# Altium PCB DDAQ.PcbDoc (part 2 of 2)
Units mil, origin at the board's own origin, x right, y up, seen from the top; angles counter-clockwise.
Board outline 3460 x 3375 mil, 2 copper layers (Top Layer, Bottom Layer); 150 components, 168 nets, 579 pads, 171 vias.
Unrouted connection lines stored in the file: 4.
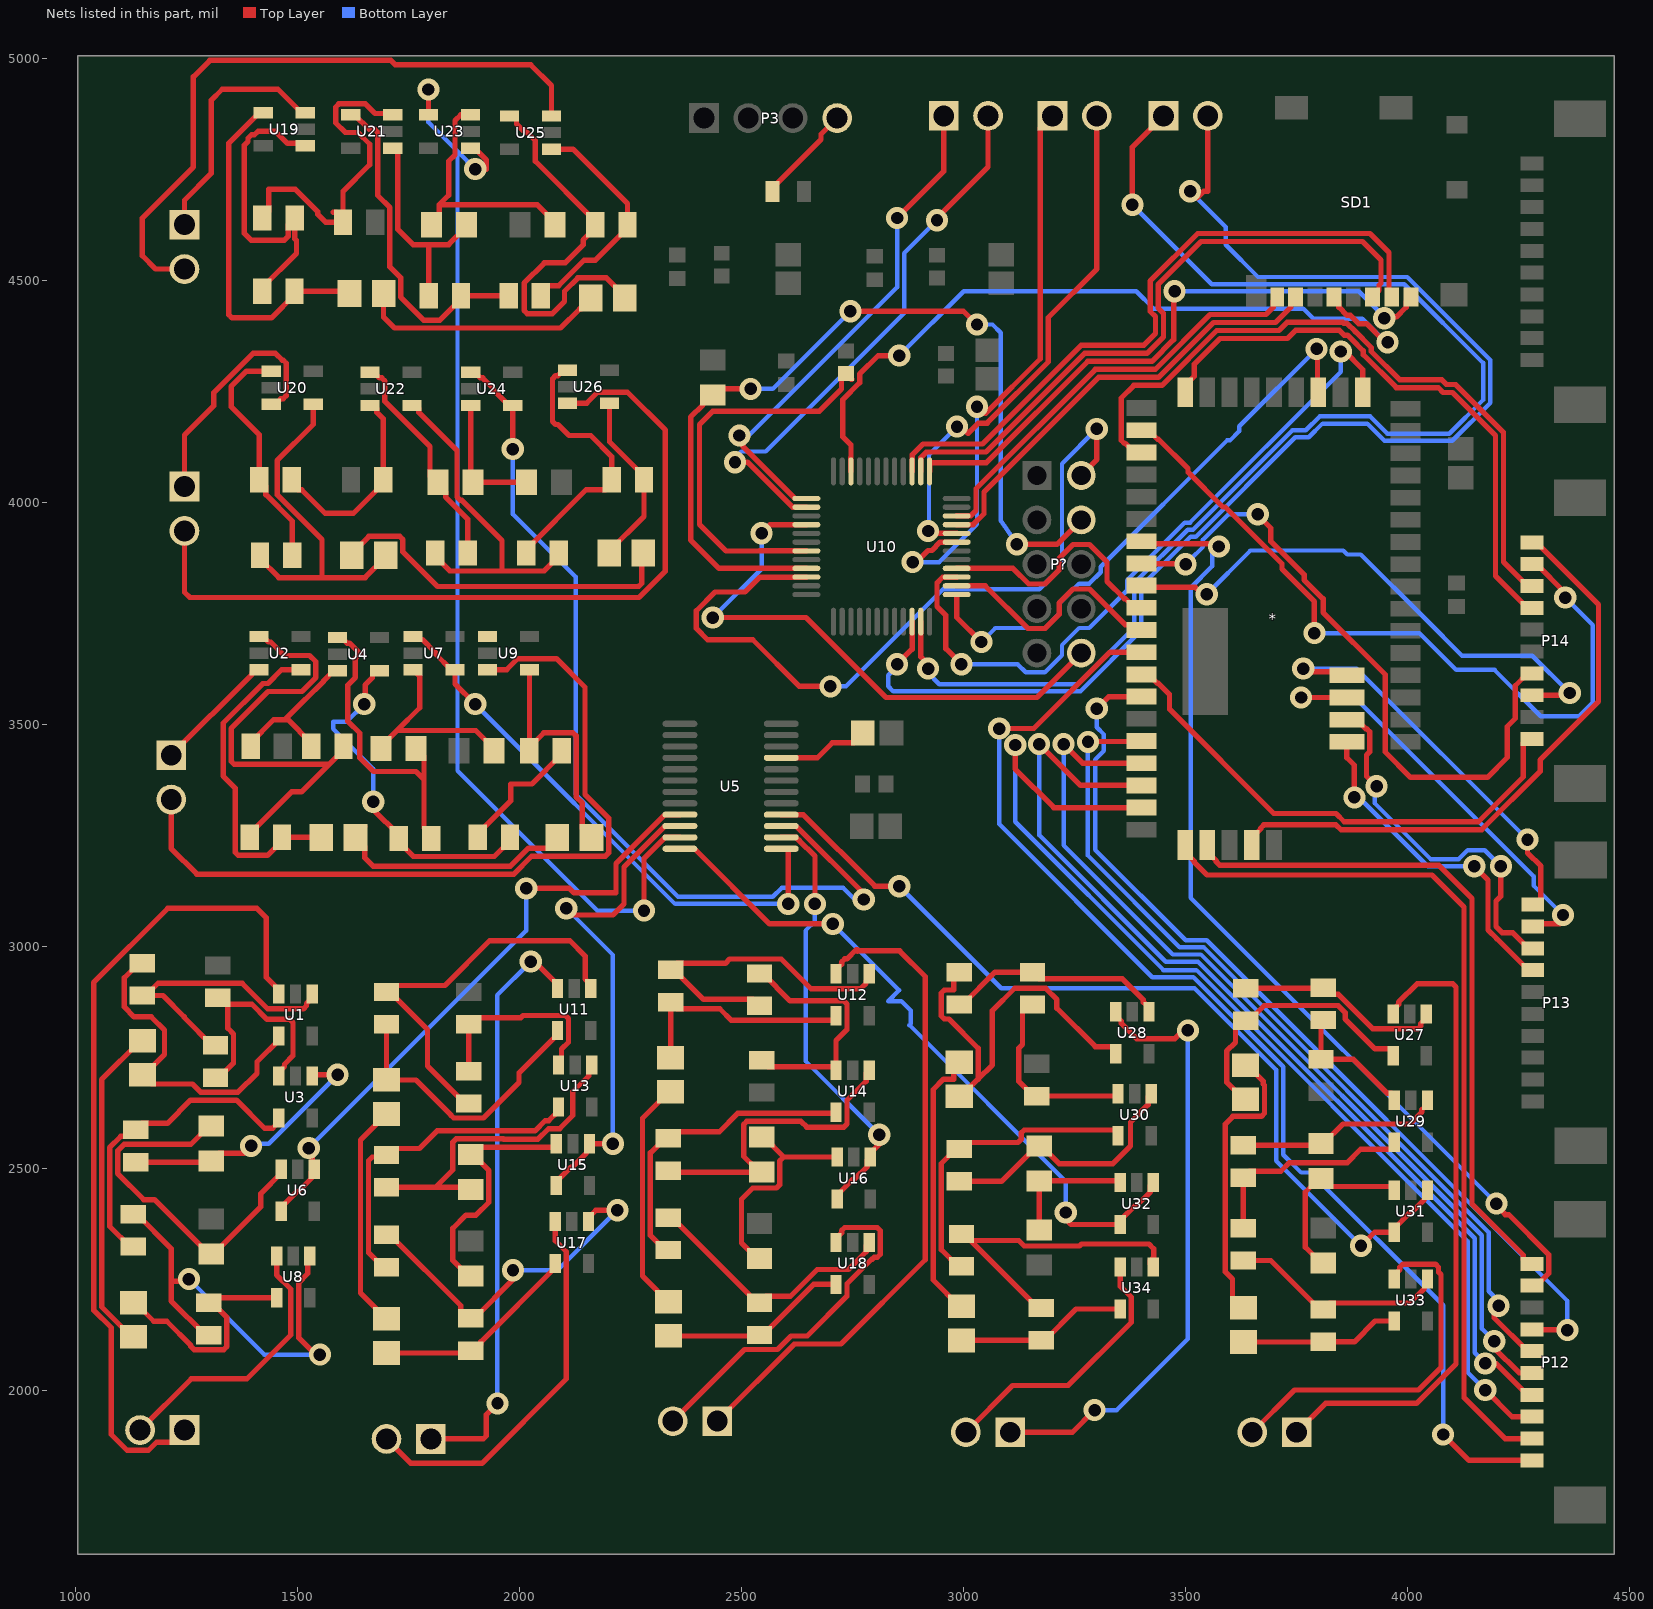
[diagram p2: the nets of this part, all layers, seen from the top]

## Via types
v1: diameter 50, hole 28, Top Layer to Bottom Layer, 171 vias

## Nets (pads, with @x,y where several pads share a name; then routed paths per layer and width w, separated by ;. In a path a pad name is that pad's centre, name@x,y a point inside that pad or via, vN(x,y) a via of type N, cw(c..) or ccw(c..) an arc to the next point about the centre after c; other vN are vias at no path point) (continued)
Net*_32: *.32 P12.9 | length 2212
  Top Layer w12: *.32@3400.51,3911.97 3406.5,3905.98 3569.02,3905.98 v1(3575,3900) ; v1@4205,2410 4220,2395 4227.8,2395 4317.59,2305.21 4317.59,2263.02 4289.84,2235.27 P12.9@4280,2235.27
  Bottom Layer w10: v1@3560,3900 3560,3855.91 3511.5,3807.41 3511.5,3108.5 v1(4200,2420)
Net*_33: *.33 P14.4 | length 1504.2
  Top Layer w12: *.33@3400.51,3861.97 3401.5,3860.98 3499.02,3860.98 v1(3500,3860) ; v1(3662.5,3972.5) 3662.5,3970.69 3692,3941.19 3692,3911.69 3767,3836.69 3767,3824.76 3809.65,3782.11 3809.65,3751.74 3949.54,3611.86 3949.54,3437.31 4006.85,3380 4179.54,3380 4224.41,3424.87 4224.41,3494.75 4242.41,3512.75 4242.41,3586.47 4270.16,3614.21 P14.4@4280,3614.21
  Bottom Layer w10: v1@3500,3870 3510,3870 3539,3899 3539,3915.21 3596.29,3972.5 v1(3662.5,3972.5)
Net*_34: *.34 P14.3 | length 1233.4
  Top Layer w12: *.34@3400.51,3811.97 3404.48,3808 3521.72,3808 3537.22,3792.5 v1(3547.5,3792.5) ; P14.3@4280,3565 4360,3565 v1(4365,3570)
  Bottom Layer w10: v1(3547.5,3792.5) 3646,3891 3854.91,3891 3863.91,3882 3894.46,3882 4039.46,3737 4122.46,3654 4281,3654 v1(4365,3570)
Net*_37: *.37 P12.1 | length 2686.7
  Top Layer w12: v1(3080,3490) 3157.9,3490 3329.87,3661.97 *.37@3400.51,3661.97 ; v1(4080,1900) 4138.43,1841.57 P12.1@4280,1841.57
  Bottom Layer w10: v1(3080,3490) 3080,3275 3425,2930 3517.63,2930 3719.67,2727.95 3719.67,2530.33 3760,2490 3780.91,2490 4080,2190.91 v1(4080,1900)
Net*_38: *.38 P14.1 | length 1158.3
  Top Layer w12: *.38@3400.51,3611.97 3416.26,3611.97 3436.54,3591.69 3438.95,3591.69 3463.5,3567.13 3463.5,3533.58 3698.45,3298.64 3838.58,3298.64 3857.22,3280 4159.27,3280 4260.41,3381.14 4260.41,3456.83 4270.16,3466.58 P14.1@4280,3466.58
Net*_39: *.39 P12.7 | length 2076.1
  Top Layer w12: v1(3300,3535) 3326.97,3561.97 *.39@3400.51,3561.97 ; P12.7@4280,2136.85 4280.93,2135.93 4359.07,2135.93 v1(4360,2135)
  Bottom Layer w10: v1(3300,3535) 3300,3492.63 3316,3476.63 3316,3440 3296,3420 3296,3217 3500,3013 3547.76,3013 4360,2200.76 v1(4360,2135)
Net*_41: *.41 P12.6 | length 1953.7
  Top Layer w12: v1(3280,3460) 3280.98,3460.98 3399.53,3460.98 *.41@3400.51,3461.97 ; v1(4205,2190) 4195,2180 4195,2162.8 4270.16,2087.64 P12.6@4280,2087.64
  Bottom Layer w10: v1(3280,3460) 3280,3204 3487,2997 3541.14,2997 4183,2355.14 4183,2222.82 4205,2200.82 v1(4205,2190)
Net*_42: *.42 P12.5 | length 2100.8
  Top Layer w12: v1(3225,3455) 3268.03,3411.97 *.42@3400.51,3411.97 ; v1(4195,2110) 4195,2095 4251.58,2038.42 P12.5@4280,2038.42
  Bottom Layer w10: v1(3225,3455) 3225,3227 3471,2981 3534.51,2981 4167,2348.51 4167,2138.57 4195,2110.57 v1(4195,2110)
Net*_43: *.43 P12.4 | length 2257.3
  Top Layer w12: v1(3170,3455) 3263.03,3361.97 *.43@3400.51,3361.97 ; v1(4175,2060) 4199.37,2060 4270.16,1989.21 P12.4@4280,1989.21
  Bottom Layer w10: v1(3170,3455) 3170,3250 3455,2965 3527.88,2965 4151,2341.88 4151,2084 v1(4175,2060)
Net*_44: *.44 P12.3 | length 2439.6
  Top Layer w12: v1(3116,3453) 3116,3399 3203.03,3311.97 *.44@3400.51,3311.97 ; v1(4175,2000) 4235,1940 P12.3@4280,1940
  Bottom Layer w10: v1(3116,3453) 3116,3280 3450,2946 3524.25,2946 4135,2335.25 4135,2040 v1(4175,2000)
Net*_46: *.46 P12.2 | length 1993.4
  Top Layer w12: *.46@3498.94,3227.72 3498.94,3211.97 3519.22,3191.69 3519.22,3189.28 3548.5,3160 4055,3160 4127,3088 4127,1983 4220,1890 4279.21,1890 P12.2@4280,1890.79
Net*_47: *.47 P12.10 | length 1541
  Top Layer w12: *.47@3548.94,3227.72 3548.94,3211.97 3569.14,3191.77 3569.14,3189.36 3576.25,3182.25 4069.97,3182.25 4145,3107.22 4145,2419.49 4260.41,2304.08 4260.41,2294.24 4270.16,2284.49 P12.10@4280,2284.49
Net*_52: *.52 P13.7 | length 760.9
  Top Layer w12: *.52@3863.11,3460 3863.11,3424.28 3880,3407.39 v1(3880,3335) ; v1(4150,3180) 4181,3149 4181,3036.56 4201.07,3016.49 4271.89,2945.67 P13.7@4281.73,2945.67
  Bottom Layer w10: v1(3880,3335) 3890,3335 4045,3180 v1(4150,3180)
Net*_53: *.53 P13.8 | length 840.2
  Top Layer w12: *.53@3863.11,3510 3884.76,3510 3905.05,3489.72 3907.45,3489.72 3914.48,3482.69 3914.48,3437.31 3907.45,3430.28 3907.45,3382.55 v1(3930,3360) ; v1(4210,3180) 4210,3112.37 4199,3101.37 4199,3044.02 4212.69,3030.32 4236.45,3030.32 4271.89,2994.88 P13.8@4281.73,2994.88
  Bottom Layer w10: v1(3930,3360) 3926.31,3356.31 3926.31,3321.31 4051.63,3196 4115,3196 4135,3216 4174,3216 v1(4210,3180)
Net*_54: *.54 P13.9 | length 1004.8
  Top Layer w12: v1(3760,3560) *.54@3863.11,3560 ; P13.9@4271.89,3044.09 P13.9@4281.73,3044.09 4287.64,3050 4342.97,3050 4350,3057.03 v1(4350,3070)
  Bottom Layer w10: v1(3760,3560) 3880.91,3560 4283.63,3157.28 4283.63,3136.37 v1(4350,3070)
Net*_55: *.55 P13.10 | length 940.5
  Top Layer w12: v1(3765,3625) 3772.27,3617.73 3855.38,3617.73 *.55@3863.11,3610 ; v1(4270,3240) 4270,3210 4300,3180 4300,3103.06 4290.25,3093.31 P13.10@4281.73,3093.31
  Bottom Layer w10: v1(3765,3625) 3885,3625 v1(4270,3240)
NetC12_2: C12.2 U5.21 | length 207.7
  Top Layer w12: U5.21@2589.17,3423.98 2670.3,3423.98 2704.32,3458 2752.49,3458 2772.52,3478.03 C12.2@2772.52,3480
NetC13_1: C13.1 U10.43 | length 883.4
  Top Layer w12: U10.43@2645.71,3890.16 2540.87,3890.16 2540.71,3890 2465,3890 2405,3950 2405,4175 2435,4205 2675.2,4205 2724.87,4254.68 2724.87,4279.28 C13.1@2735,4289.41 ; C13.1@2746.81,4276.61 C13.1@2747.8,4276.61
NetFB1_2: FB1.2 P3.4 | length 225.2
  Top Layer w12: FB1.2@2569.57,4700 2569.57,4707.87 2678.61,4816.92 2678.61,4828.61 P3.4@2715,4865
NetP1_1: P1.1 U1.3 | length 1891.8
  Top Layer w12: P1.1@1245,1910 1217.54,1882.54 1181.83,1882.54 1163.83,1864.54 1115.46,1864.54 1080,1900 1080,2140.61 1040.46,2180.15 1040.46,2918.06 1207.4,3085 1407.97,3085 1429.39,3063.58 1429.39,2929.31 1457.6,2901.1 U1.3@1457.6,2892.24 U1.3@1457.6,2883.39
NetP1_2: P1.2 U8.3 | length 619.4
  Top Layer w12: P1.2@1145,1910 1260.25,2025.26 1385.26,2025.26 1484.61,2124.61 1484.61,2227.17 1452.6,2259.18 U8.3@1452.6,2302.24
NetP2_1: P2.1 U2.3 | length 279.7
  Top Layer w12: P2.1@1215,3430 1397.1,3612.1 1397.1,3615.8 1403.9,3622.6 U2.3@1412.76,3622.6
NetP2_2: P2.2 U9.3 | length 1790.8
  Top Layer w12: P2.2@1215,3330 1215,3220 1273,3162 1986.79,3162 2027.28,3202.49 2193.32,3202.49 2200.35,3209.52 2200.35,3288.33 2147,3341.67 2147,3583 2082.61,3647.39 1995.62,3647.39 1970.82,3622.6 U9.3@1927.76,3622.6
NetP4_1: P4.1 U10.11 | length 2989.1
  Top Layer w12: U10.11@2903.58,3730.71 2903.58,3651.7 2920,3635.28 v1(2920,3625) ; v1(3380,4670) 3380,4800 P4.1@3450,4870
  Bottom Layer w10: v1(2920,3625) 2920,3615 2945,3590 3256.49,3590 3384.28,3717.79 3384.28,3817.82 3504.46,3938 3516.54,3938 3740.54,4162 3770.83,4162 3801.83,4193 3915.54,4193 3954.54,4154 4094,4154 4170,4230 4170,4313.54 3992.54,4491 3559,4491 v1(3380,4670)
NetP4_2: P4.2 U10.10 | length 3064.5
  Top Layer w12: v1(2850,3635) 2883.9,3668.9 U10.10@2883.9,3730.71 ; v1(3510,4700) 3510.22,4700 3525.25,4684.97 3540.28,4700 3550,4700 P4.2@3550,4870
  Bottom Layer w10: v1(2850,3635) 2850,3630 2830,3610 2830,3585 2841,3574 3263.12,3574 3400.28,3711.16 3400.28,3811.19 3511.09,3922 3523.17,3922 3747.17,4146 3777.46,4146 3808.46,4177 3908.91,4177 3947.91,4138 4100.63,4138 4186,4223.37 4186,4320.17 3999.17,4507 3663,4507 3590.33,4579.67 3590.33,4619.67 v1(3510,4700)
NetP5_1: P5.1 U10.19 | length 1321.2
  Top Layer w12: v1(2885,3865) 2893.79,3865 2919.8,3891.01 2928.34,3891.01 2947.07,3909.75 2984.2,3909.75 U10.19@2984.29,3909.84 ; v1(3030,4215) 3045,4200 3049.57,4200 3172.54,4322.97 3172.54,4842.54 P5.1@3200,4870
  Bottom Layer w10: v1(2885,3865) 2945,3865 3030,3950 v1(3030,4215)
NetP5_2: P5.2 U10.20 | length 1206.5
  Top Layer w12: v1(2920,3935) 2925.38,3929.62 2984.2,3929.62 U10.20@2984.29,3929.53 ; v1(2985,4170) 2995,4170 3010,4155 3033,4178 3053.02,4178 3190.54,4315.51 3190.54,4415.54 3300,4525 P5.2@3300,4870
  Bottom Layer w10: v1(2920,3935) 2920,3945 2922,3947 2922,4107 v1(2985,4170)
NetP6_1: P6.1 U10.37 | length 1141.8
  Top Layer w12: v1(2495,4150) 2502.27,4142.73 2502.27,4126.3 2620.31,4008.27 U10.37@2645.71,4008.27 ; v1(2850,4640) 2955,4745 P6.1@2955,4870
  Bottom Layer w10: v1(2495,4150) 2515.91,4150 2850,4484.09 v1(2850,4640)
NetP6_2: P6.2 U10.38 | length 1260.2
  Top Layer w12: v1(2485,4090) 2513.06,4090 2614.48,3988.58 U10.38@2645.71,3988.58 ; v1@2940,4640 3055,4755 P6.2@3055,4870
  Bottom Layer w10: v1(2485,4090) 2475,4090 2499,4114 2554,4114 2866,4426 2866,4561 v1(2940,4635)
NetP7_1: P7.1 U11.3 | length 1328.6
  Top Layer w12: P7.1@1800,1890 1917.97,1890 1925,1897.03 1925,1945 v1(1950,1970) ; v1(2025,2965) 2033.54,2965 2085.2,2913.35 U11.3@2085.2,2904.49
  Bottom Layer w10: v1(1950,1970) 1949,1971 1949,2889 v1(2025,2965)
NetP7_2: P7.2 U17.3 | length 871.2
  Top Layer w12: P7.2@1700,1890 1755,1835 1915,1835 2104.99,2024.99 2104.99,2311.62 2080.2,2336.42 U17.3@2080.2,2379.49
NetP8_1: P8.1 U12.3 | length 1517.1
  Top Layer w12: P8.1@2445,1930 2618.73,2103.73 2723.73,2103.73 2913.46,2293.46 2913.46,2931.54 2855.79,2989.21 2762.18,2989.21 2760.97,2988 2760.97,2992 2758.18,2992 2737.39,2971.21 2732.23,2971.21 2725.2,2964.18 2725.2,2959.02 2712.6,2946.42 U12.3@2712.6,2937.56
NetP8_2: P8.2 U18.3 | length 817.2
  Top Layer w12: P8.2@2345,1930 2506.23,2091.23 2580.77,2091.23 2611.28,2121.73 2647.68,2121.73 2737.39,2211.45 2737.39,2239.48 2792.91,2295 2794.2,2295 2798.1,2298.91 2805.17,2298.91 2812.2,2305.93 2812.2,2359.18 2805.17,2366.21 2732.23,2366.21 2725.2,2359.18 2725.2,2354.02 2712.6,2341.42 U18.3@2712.6,2332.56
NetP10_1: P10.1 U19.3 | length 559.8
  Top Layer w12: P10.1@1245,4625 1245,4680 1305,4740 1305,4905 1330,4930 1455.47,4930 1508.07,4877.4 U19.3@1516.93,4877.4 1518.2,4877.4 U19.3@1525,4884.2
NetP10_2: P10.2 U25.3 | length 1472
  Top Layer w12: P10.2@1245,4525 1180,4525 1150,4555 1150,4640 1265,4755 1265,4957.97 1302.03,4995 1710,4995 1720,4985 2025,4985 2071.69,4938.31 U25.3@2071.69,4869.8
NetP11_1: P11.1 U20.3 | length 562.6
  Top Layer w12: P11.1@1245,4035 1245,4150.91 1311.27,4217.18 1311.27,4246.73 1399.57,4335.03 1449.97,4335.03 1465.2,4319.8 1467.14,4319.8 1474.17,4312.77 1474.17,4239.83 1467.14,4232.8 1461.98,4232.8 1449.37,4220.2 U20.3@1440.51,4220.2
NetP11_2: P11.2 U26.3 | length 1834
  Top Layer w12: P11.2@1245,3935 1245,3797.03 1257.03,3785 2268.43,3785 2328.03,3844.6 2328.03,4161.97 2242.61,4247.39 2175.62,4247.39 2150.82,4222.6 U26.3@2107.76,4222.6
NetP16_1: P16.1 U27.3 | length 1452.7
  Top Layer w12: P16.1@3750,1905 3815,1970 4020,1970 4109,2059 4109,2907.97 4101.97,2915 4021.02,2915 3979.89,2873.87 3979.89,2868.71 3967.28,2856.1 U27.3@3967.28,2847.24
NetP16_2: P16.2 U33.3 | length 838.4
  Top Layer w12: P16.2@3650,1905 3745,2000 4024.54,2000 4075,2050.46 4075,2260 4069.48,2265.52 4069.48,2276.62 4062.45,2283.65 3989.52,2283.65 3982.49,2276.62 3982.49,2271.47 3969.88,2258.86 U33.3@3969.88,2250
NetP17_1: P17.1 U28.3 | length 1394.4
  Top Layer w12: P17.1@3105,1905 3245,1905 v1(3295,1955) ; U28.3@3342.6,2861.1 U28.3@3342.6,2852.24 3342.6,2843.39 3355.2,2830.78 3355.2,2825.62 3389.41,2791.41 3476.13,2791.41 3494.72,2810 v1(3505,2810)
  Bottom Layer w10: v1(3295,1955) 3345,1955 3505,2115 v1(3505,2810)
NetP17_2: P17.2 U34.3 | length 610
  Top Layer w12: P17.2@3005,1905 3110.25,2010.26 3235.26,2010.26 3377.39,2152.39 3377.39,2209.38 3352.6,2234.18 U34.3@3352.6,2277.24
NetP?_4: P?.4 R41.1 U10.45 | length 2039.5
  Top Layer w12: v1(2520,4255) 2448.74,4255 R41.1@2435,4241.26 2430.08,4241.26 2412.46,4223.64 2412.46,4218.72 2385,4191.26 2385,3915 2449.21,3850.79 U10.45@2645.71,3850.79 ; v1(2745,4430) 2999.19,4430 3029.19,4400 v1(3030,4400) ; v1(3120,3905) 3210,3905 P?.4@3265,3960
  Bottom Layer w10: v1(2520,4255) 2570,4255 v1(2745,4430) ; v1(3030,4400) 3065,4400 3083.45,4381.55 3083.45,3958.42 v1(3120,3905)
NetR1_1: R1.1 R17.1 U8.1 | length 1007.7
  Top Layer w12: R17.1@1130,2396.1 1137.87,2396.1 1215,2318.98 1215,2245 ; v1(1255,2250) 1250,2245 1215,2245 ; R1.1@1300,2123.58 1292.13,2123.58 1215,2200.71 1215,2245 ; U8.1@1527.4,2302.24 1522.59,2297.43 1522.59,2262.59 1502.61,2242.61 1502.61,2117.39 v1@1540,2080
  Bottom Layer w10: v1(1255,2250) 1425,2080 v1(1550,2080)
NetR1_2: R1.2 R12.1 U8.4 | length 536
  Top Layer w12: R12.1@1130,2196.77 1133.94,2196.77 1175.71,2155 1205,2155 1259.46,2100.54 1259.46,2097.94 1266.49,2090.91 1333.51,2090.91 1340.54,2097.94 1340.54,2163.75 1307.87,2196.42 R1.2@1300,2196.42 1311.34,2207.76 U8.4@1452.6,2207.76
NetR2_1: R2.1 R12.2 | length 738.9
  Top Layer w12: R12.2@1130,2120 1126.06,2120 1058.46,2187.61 1058.46,2699.17 1146.06,2786.77 R2.1@1150,2786.77
NetR2_2: R2.2 R7.1 U1.4 | length 752.7
  Top Layer w12: R7.1@1150,2961.42 1142.13,2961.42 1109.46,2928.75 1109.46,2862.94 1131.77,2840.63 1170.2,2840.63 1200,2810.83 1200,2756.06 1153.94,2710 R2.2@1150,2710 1170.57,2689.43 1262.97,2689.43 1281.49,2670.91 1365.7,2670.91 1408.25,2713.47 1408.25,2739.55 1457.6,2788.9 U1.4@1457.6,2797.76
NetR3_2: R3.2 R4.2 U3.3 | length 518.7
  Top Layer w12: R4.2@1315,2703.58 1322.87,2703.58 1355.54,2736.25 1355.54,2802.06 1342.54,2815.06 R3.2@1342.54,2868.91 ; R3.2@1320,2883.58 1334.67,2868.91 R3.2@1342.54,2868.91 ; U3.3@1457.6,2707.24 1457.6,2716.1 1470.2,2728.71 1470.2,2733.87 1489.61,2753.27 1489.61,2827.97 1482.58,2835 1430.73,2835 1396.82,2868.91 R3.2@1342.54,2868.91
NetR4_1: R4.1 R7.2 U1.1 | length 653.3
  Top Layer w12: R7.2@1150,2888.58 R7.2@1157.87,2888.58 ; R4.1@1315,2776.42 1307.13,2776.42 1244.5,2839.04 1244.5,2840.63 1196.54,2888.58 R7.2@1157.87,2888.58 ; U1.1@1532.4,2901.1 U1.1@1532.4,2892.24 1532.4,2883.39 1519.8,2870.78 1519.8,2865.62 1512.77,2858.59 1432.59,2858.59 1374.93,2916.25 1185.54,2916.25 R7.2@1157.87,2888.58
NetR5_2: R5.2 R6.2 U4.3 | length 355.2
  Top Layer w12: R5.2@1393.9,3450 1393.9,3457.87 1446.02,3510 1470.63,3510 1478.19,3510 1530.31,3457.87 R6.2@1530.31,3450 ; 1474.41,3513.78 1516.21,3555.58 1517.1,3555.58 1558.9,3597.38 1558.9,3598.27 1580.83,3620.2 U4.3@1589.68,3620.2
NetR6_1: R6.1 R9.2 U2.1 | length 1028.2
  Top Layer w12: R9.2@1391.73,3245 1391.73,3252.87 1486.36,3347.5 1508.52,3347.5 1570.48,3409.46 ; U2.1@1412.76,3697.4 1421.61,3697.4 1434.22,3684.8 1439.38,3684.8 1469.57,3654.61 1526.65,3654.61 1540.9,3640.36 1540.9,3604.83 1509.64,3573.58 1433.58,3573.58 1350,3490 1350,3416.49 1357.03,3409.46 1570.48,3409.46 ; R6.1@1603.15,3450 1603.15,3442.13 1570.48,3409.46
NetR8_1: R8.1 R11.2 U6.3 | length 829.8
  Top Layer w12: R11.2@1305,2594.37 1300.08,2594.37 1259.14,2553.44 1108.98,2553.44 1094.46,2538.91 1094.46,2487.63 1153.31,2428.77 1177.41,2428.77 1300.08,2306.1 R8.1@1305,2306.1 1309.92,2306.1 1417,2413.18 1417,2442.79 1462.6,2488.39 U6.3@1462.6,2497.24
NetR9_1: R9.1 R13.2 U2.4 | length 745.5
  Top Layer w12: U2.4@1507.24,3622.6 1464.18,3622.6 1433.16,3591.58 1421.58,3591.58 1332,3502 1332,3382.96 1359.06,3355.9 1359.06,3211.49 1366.09,3204.46 1431.9,3204.46 1464.57,3237.13 R9.1@1464.57,3245 R13.2@1553.35,3245
NetR10_1: R10.1 R14.2 U7.3 | length 464.6
  Top Layer w12: R14.2@1687.99,3445 1687.99,3449.92 1723.61,3485.54 ; U7.3@1760,3622.6 1775,3607.6 1775,3536.93 1723.61,3485.54 ; R10.1@1941.73,3435.08 R10.1@1941.73,3440 1941.73,3444.92 1901.11,3485.54 1723.61,3485.54
NetR11_1: R11.1 R16.2 U3.1 | length 598.6
  Top Layer w12: R16.2@1137.36,2515.63 R16.2@1135,2513.27 1302.64,2513.27 R11.1@1305,2515.63 1322.62,2533.25 1378.25,2533.25 v1(1395,2550) ; U3.1@1532.4,2707.24 1535.16,2710 v1(1590,2710)
  Bottom Layer w10: v1(1395,2550) 1400,2555 1435,2555 v1(1590,2710)
NetR13_1: R13.1 R15.2 | length 562.7
  Top Layer w12: R13.1@1650.69,3269.51 1630.12,3248.94 R13.1@1630.12,3245 1650.69,3224.43 1650.69,3199.31 1670,3180 1979.33,3180 2019.82,3220.49 2064.43,3220.49 2085,3241.06 R15.2@2085,3245 R15.2@2085,3248.94
NetR14_1: R14.1 R19.2 U4.1 | length 700.1
  Top Layer w12: U4.1@1598.54,3695 1611.15,3682.39 1616.31,3682.39 1640,3658.7 1630,3648.7 1630,3605 1613,3588 1613,3506.33 1640,3479.33 1640,3423.86 1670.61,3393.24 1766.11,3393.24 1784.35,3375 ; R14.1@1766.73,3440.08 R14.1@1766.73,3445 1784.35,3427.38 1784.35,3375 ; R19.2@1800.75,3242.17 1800.75,3250.04 1784.35,3266.43 1784.35,3375
NetR15_1: R15.1 R18.2 U9.4 | length 546.9
  Top Layer w12: R18.2@2021.73,3440 2021.73,3447.87 R18.2@2022.24,3448.39 ; U9.4@2022.24,3622.6 R18.2@2022.24,3448.39 ; R15.1@2161.77,3245 2141.2,3265.57 2141.2,3322.02 2127.24,3335.98 2127.24,3473.51 2120.21,3480.54 2054.4,3480.54 R18.2@2022.24,3448.39
NetR16_1: R16.1 R17.2 U3.4 | length 716
  Top Layer w12: R17.2@1130,2323.27 1122.13,2323.27 1076.46,2368.94 1076.46,2546.36 1101.53,2571.44 1120.33,2571.44 1149.67,2600.77 1206.66,2600.77 1258.8,2652.91 1362.09,2652.91 1425.2,2589.8 1443.5,2589.8 1457.6,2603.9 U3.4@1457.6,2612.76
NetR18_1: R18.1 R20.1 U9.1 | length 309.1
  Top Layer w12: R20.1@1905.31,3245 1905.31,3252.87 1980,3327.56 1980,3365 2027.44,3365 2094.57,3432.13 R18.1@2094.57,3440 R18.1@2094.57,3447.87
NetR19_1: R19.1 R20.2 U4.4 | length 808.3
  Top Layer w12: v1(1650,3545) 1651.98,3546.98 1651.98,3588 1668.52,3604.54 1668.52,3613.4 1675.31,3620.2 U4.4@1684.17,3620.2 U4.4@1693.03,3620.2 ; v1(1670,3325) 1670,3307.95 1727.91,3250.04 R19.1@1727.91,3242.17 1727.91,3234.29 1760.58,3201.62 1942.65,3201.62 1978.15,3237.13 R20.2@1978.15,3245
  Bottom Layer w10: v1(1650,3545) 1610,3505 1580,3505 1580,3489.09 1670,3399.09 v1(1670,3325)
NetR21_2: R21.2 R22.2 U13.3 | length 455.5
  Top Layer w12: R22.2@1885,2718.15 R21.2@1885,2823.9 1899.67,2838.57 2002.71,2838.57 2007.8,2843.65 2102.96,2843.65 2109.99,2836.62 2109.99,2783.38 2094.39,2767.78 2094.39,2739.04 U13.3@2087.6,2732.24
NetR22_1: R22.1 R25.2 U11.1 | length 919.4
  Top Layer w12: R25.2@1700,2896.73 1707.87,2896.73 1792.5,2812.11 1792.5,2729.94 1877.13,2645.31 R22.1@1885,2645.31 ; R25.2@1703.94,2900.67 1714.67,2911.4 1831.4,2911.4 1932,3012 2113,3012 2147.39,2977.61 2147.39,2925.95 2160,2913.35 U11.1@2160,2904.49
NetR23_2: R23.2 R24.2 U14.3 | length 569.8
  Top Layer w12: R24.2@2532.13,2938.15 R24.2@2540,2938.15 2547.87,2938.15 2609.3,2876.72 2730.36,2876.72 2737.39,2869.69 2737.39,2811.83 2712.6,2787.04 U14.3@2712.6,2721.68 ; R23.2@2545,2743.15 2559.67,2728.48 2705.8,2728.48 U14.3@2712.6,2721.68 ; U14.3@2712.6,2720.31 U14.3@2712.6,2721.68
NetR24_1: R24.1 R27.2 U12.1 | length 741
  Top Layer w12: R24.1@2540,2865.31 2525.33,2879.98 2414.31,2879.98 2347.87,2946.42 R27.2@2340,2946.42 2354.67,2961.09 2463.16,2961.09 2472.89,2970.82 2589.18,2970.82 2656.09,2903.91 2767.77,2903.91 2780,2916.14 2780,2921.3 2787.4,2928.7 U12.1@2787.4,2937.56
NetR25_1: R25.1 R28.2 U11.4 | length 646.4
  Top Layer w12: R25.1@1700,2823.9 R28.2@1700,2698.51 1766.49,2698.51 1844.46,2620.54 1844.46,2619.67 1851.49,2612.65 1918.51,2612.65 1998.46,2692.59 1998.46,2714.4 2085.2,2801.14 U11.4@2085.2,2810
NetR26_1: R26.1 R31.2 U15.3 | length 563.3
  Top Layer w12: R26.1@1890,2256.58 1885.08,2256.58 1849.46,2292.2 1849.46,2364.46 1878.99,2393.99 1901.55,2393.99 1930.54,2422.98 1930.54,2494.69 1894.92,2530.32 R31.2@1890,2530.32 1906.86,2547.17 2075.8,2547.17 2082.6,2553.97 U15.3@2082.6,2555
NetR27_1: R27.1 R30.2 U12.4 | length 520.9
  Top Layer w12: R30.2@2340,2748.7 R27.1@2340,2873.58 2354.67,2858.91 2450.64,2858.91 2476.91,2832.65 2705.8,2832.65 2712.6,2839.44 U12.4@2712.6,2843.07
NetR28_1: R28.1 R32.2 | length 514.5
  Top Layer w12: R32.2@1700,2160.32 1696.06,2160.32 1675.49,2180.89 1675.49,2184.83 1641.46,2218.86 1641.46,2563.19 1675.49,2597.22 1675.49,2601.16 1696.06,2621.73 R28.1@1700,2621.73
NetR29_1: R29.1 R33.2 U16.3 | length 508.2
  Top Layer w12: R29.1@2540,2295.94 2535.08,2295.94 2499.46,2331.57 2499.46,2429.78 2525,2455.32 2578.51,2455.32 2585.54,2462.35 2585.54,2515.54 2594.8,2524.8 ; R33.2@2545,2569.68 2549.92,2569.68 2594.8,2524.8 ; U16.3@2715.2,2524.8 2594.8,2524.8
NetR30_1: R30.1 R34.2 | length 528.4
  Top Layer w12: R34.2@2335,2198.7 2331.06,2198.7 2310.49,2219.28 2310.49,2223.21 2276.46,2257.24 2276.46,2612.32 2336.06,2671.93 R30.1@2340,2671.93
NetR31_1: R31.1 R37.2 U13.1 | length 737.7
  Top Layer w12: R37.2@1700,2456.73 1810,2456.73 ; R31.1@1890,2451.58 1884.84,2456.73 1810,2456.73 ; U13.1@2162.4,2732.24 2155.61,2725.45 2155.61,2707.84 2119.61,2671.84 2119.61,2618.35 2089.91,2588.65 2064.83,2588.65 2041.35,2565.17 1963.82,2565.17 1963.05,2565.94 1856.49,2565.94 1849.46,2558.91 1849.46,2496.19 1810,2456.73
NetR32_1: R32.1 R35.2 U17.4 | length 471.7
  Top Layer w12: R32.1@1700,2083.54 1884.65,2083.54 R35.2@1890,2088.9 1897.87,2088.9 1912.54,2103.57 1912.54,2108.49 2080.2,2276.14 U17.4@2080.2,2285
NetR33_1: R33.1 R39.2 U14.1 | length 700.3
  Top Layer w12: R39.2@2335,2494.21 2338.27,2490.94 2530,2490.94 2530,2501.02 2504.46,2526.57 2504.46,2598.28 2511.49,2605.31 2633.62,2605.31 2646.75,2592.17 2730.36,2592.17 2737.39,2599.2 2737.39,2652.69 2780.61,2695.91 2780.61,2713.52 U14.1@2787.4,2720.31
NetR34_1: R34.1 R36.2 U18.4 | length 425.7
  Top Layer w12: R34.1@2335,2121.93 2538.03,2121.93 R36.2@2540,2123.9 2547.87,2123.9 2662.05,2238.07 U18.4@2712.6,2238.07
NetR35_1: R35.1 R38.1 U17.1 | length 799.7
  Top Layer w12: R38.1@1700,2349.57 1707.87,2349.57 1867.46,2189.98 1867.46,2176.4 1882.13,2161.73 R35.1@1890,2161.73 1897.87,2161.73 1985,2248.86 v1(1985,2270) ; U17.1@2155,2379.49 2155,2388.35 2171.65,2405 v1(2220,2405)
  Bottom Layer w10: v1(1985,2270) 2085,2270 v1(2220,2405)
NetR36_1: R36.1 R40.1 U18.1 | length 597.7
  Top Layer w12: R40.1@2335,2388.47 2342.87,2388.47 2517.46,2213.88 2517.46,2211.4 2532.13,2196.73 R36.1@2540,2196.73 2554.67,2211.4 2609.92,2211.4 2670.25,2271.72 2740.59,2271.72 2780.61,2311.75 2780.61,2325.76 U18.1@2787.4,2332.56
NetR37_1: R37.1 R38.2 U13.4 | length 744.7
  Top Layer w12: R38.2@1700,2276.73 1692.13,2276.73 1659.46,2309.4 1659.46,2516.46 1668,2525 1695.43,2525 R37.1@1700,2529.57 1714.67,2544.24 1774.24,2544.24 1813.94,2583.94 2034.66,2583.94 2057.38,2606.65 2065.35,2606.65 2087.6,2628.9 U13.4@2087.6,2637.76
NetR39_1: R39.1 R40.2 U14.4 | length 696.2
  Top Layer w12: R40.2@2335,2315.63 2327.13,2315.63 2294.46,2348.3 2294.46,2534.38 2327.13,2567.05 R39.1@2335,2567.05 2349.67,2581.72 2449.48,2581.72 2491.07,2623.31 2710.08,2623.31 U14.4@2712.6,2625.83
NetR42_2: R42.2 R44.2 U21.3 | length 775.8
  Top Layer w12: R44.2@1420.32,4640 1434.98,4654.67 1434.98,4705 1494.33,4705 1545,4654.33 1545,4648.5 1563.5,4630 R42.2@1602.17,4630 R42.2@1602.17,4637.87 ; 1579.62,4652.54 1587.5,4652.54 R42.2@1602.17,4637.87 ; U21.3@1713.93,4872.2 1710.77,4875.36 1674.28,4875.36 1652.64,4897 1625,4897 1592.82,4897 1585.79,4889.97 1585.79,4854.21 1607.42,4832.58 1635.68,4832.58 1662.28,4805.99 1662.28,4760 1602.17,4699.89 R42.2@1602.17,4637.87
NetR43_2: R43.2 R45.2 U22.3 | length 463
  Top Layer w12: R45.2@1486.42,4050.31 1486.42,4042.44 1501.09,4027.77 1508.96,4027.77 1561.73,3975 1625.4,3975 1692.84,4042.44 R43.2@1692.84,4050.31 1692.84,4187.52 1678.41,4201.94 1678.41,4210.8 1671.61,4217.6 U22.3@1662.76,4217.6
NetR44_1: R44.1 R46.2 U19.1 | length 729.9
  Top Layer w12: R46.2@1420,4475 1420,4482.87 1497.13,4560 1497.13,4589.48 1493.15,4593.46 R44.1@1493.15,4640 1478.48,4625.33 1478.48,4598.48 1470,4590 1395,4590 1380,4605 1380,4804.5 1387.91,4812.41 1387.91,4819.48 1395.82,4827.39 1402.89,4827.39 1410.5,4835 1450.33,4835 1477.28,4808.06 1511.47,4808.06 U19.1@1516.93,4802.6 U19.1@1508.07,4802.6
NetR45_1: R45.1 R47.2 U20.1 | length 541.8
  Top Layer w12: U20.1@1440.51,4295 1385,4295 1350,4260 1350,4215 1413.58,4151.42 R45.1@1413.58,4050.31 1428.25,4035.64 1428.25,4016.84 1487.84,3957.26 R47.2@1487.84,3880.31
NetR46_1: R46.1 R50.2 U19.4 | length 798.7
  Top Layer w12: U19.4@1422.44,4877.4 1413.58,4877.4 1345,4808.82 1345,4422.03 1352.03,4415 1440.71,4415 1492.84,4467.13 R46.1@1492.84,4475 1611.61,4475 R50.2@1616.61,4470
NetR47_1: R47.1 R51.2 U20.4 | length 797.7
  Top Layer w12: R47.1@1415,3880.31 1415,3872.44 1457.44,3830 1554.72,3830 ; U20.4@1535,4220.2 1535,4175 1453.75,4093.75 1453.75,4016.8 1554.72,3915.82 1554.72,3830 ; R51.2@1698.39,3880.31 1698.39,3876.38 1652.01,3830 1554.72,3830
NetR48_1: R48.1 R52.2 U23.3 | length 578.3
  Top Layer w12: R52.2@1801.26,4625 1818.88,4642.62 1818.88,4670 ; U23.3@1888.93,4872.2 1867.2,4872.2 1854.2,4859.2 1854.2,4781.93 1840,4767.73 1840,4691.12 1818.88,4670 ; R48.1@2079.37,4625 2079.37,4629.92 2039.29,4670 1818.88,4670
NetR49_1: R49.1 R53.2 U24.3 | length 295
  Top Layer w12: U24.3@1890,4217.6 1890,4049.37 R53.2@1894.37,4045 R49.1@2015,4045
NetR50_1: R50.1 R54.2 | length 560.7
  Top Layer w12: R50.1@1693.39,4470 1693.39,4416.61 1718,4392 2092,4392 2135.49,4435.49 2139.43,4435.49 2160,4456.06 R54.2@2160,4460
NetR51_1: R51.1 R55.2 | length 808.9
  Top Layer w12: R51.1@1621.61,3880.31 1621.61,3884.25 1660.19,3922.83 1729.93,3922.83 1736.96,3915.8 1736.96,3888.04 1815,3810 2267.97,3810 2275,3817.03 2275,3881.93 R55.2@2278.39,3885.31
NetR52_1: R52.1 R58.2 U21.1 | length 498
  Top Layer w12: U21.1@1713.93,4797.4 1718.87,4797.4 1725.67,4790.61 1725.67,4614.33 1760,4580 1795,4580 1799.96,4580 ; R58.2@1795,4465 1795,4575.04 1799.96,4580 ; R52.1@1880,4625 1880,4620.08 1839.92,4580 1799.96,4580
NetR53_1: R53.1 R60.2 U22.1 | length 506.5
  Top Layer w12: U22.1@1662.76,4292.4 1671.61,4292.4 1684.22,4279.8 1689.38,4279.8 1696.41,4272.77 1696.41,4227.01 1798.01,4125.41 1798.01,4057.7 1833.25,4022.45 1833.25,4011.52 1882.84,3961.94 R60.2@1882.84,3885.31
NetR54_1: R54.1 R56.2 U25.4 | length 917.2
  Top Layer w12: U25.4@1977.2,4869.8 1986.06,4869.8 1992.85,4863.01 1992.85,4851.71 2006.77,4837.79 2011.28,4837.79 2035,4814.07 2035,4767.87 2170,4632.87 R56.2@2170,4625 2170,4617.13 2143,4590.13 2143,4579.57 2102.47,4539.04 2055.7,4539.04 2010,4493.35 2010,4431.49 2017.03,4424.46 2073.48,4424.46 2100.97,4451.95 2100.97,4475.02 2130.94,4505 2195.71,4505 2236.77,4463.94 R54.1@2236.77,4460
NetR55_1: R55.1 R57.2 U26.4 | length 402
  Top Layer w12: R55.1@2201.61,3885.31 2201.61,3889.25 2280,3967.64 R57.2@2280,4050.31 2280,4058.19 2202.24,4135.94 U26.4@2202.24,4222.6
NetR56_1: R56.1 R59.1 U25.1 | length 539.7
  Top Layer w12: R59.1@2047.84,4465 2047.84,4472.87 2062.51,4487.54 2088.03,4487.54 2145.49,4545 2170.71,4545 2242.84,4617.13 2242.84,4672.16 2120,4795 U25.1@2071.69,4795
NetR57_1: R57.1 R61.1 U26.1 | length 625.6
  Top Layer w12: R61.1@2015,3885.31 2015,3893.19 2149.58,4027.77 2192.49,4027.77 2207.16,4042.44 R57.1@2207.16,4050.31 2207.16,4102.84 2160.05,4149.95 2111.36,4149.95 2086.31,4175 2081.13,4175 2074.1,4182.03 2074.1,4277.77 2081.13,4284.79 2086.29,4284.79 2098.9,4297.4 U26.1@2107.76,4297.4
NetR58_1: R58.1 R59.2 U21.4 | length 761.5
  Top Layer w12: U21.4@1619.44,4872.2 1628.3,4872.2 1660.5,4840 1673.25,4840 1680.28,4832.97 1680.28,4690.91 1707.67,4663.51 1707.67,4529.77 1731.96,4505.48 1731.96,4461.86 1783.82,4410 1820.71,4410 1867.83,4457.13 R58.1@1867.83,4465 R59.2@1975,4465
NetR60_1: R60.1 R61.2 U22.4 | length 784.7
  Top Layer w12: U22.4@1757.24,4217.6 1766.1,4217.6 1772.9,4210.8 1772.9,4201.94 1858.75,4116.09 1858.75,4011.48 1865.78,4004.45 1869.25,4004.45 1960,3913.71 1960,3844.77 ; R60.1@1810,3885.31 1810,3877.44 1842.67,3844.77 1960,3844.77 ; R61.2@2087.83,3885.31 2087.83,3877.44 2055.16,3844.77 1960,3844.77
NetR62_2: R62.2 R63.2 U29.3 | length 298.9
  Top Layer w12: R63.2@3810,2833.58 3805,2828.58 R62.2@3805,2745 3877.64,2745 3954.23,2668.41 3963.08,2668.41 3969.88,2661.61 U29.3@3969.88,2652.76
NetR63_1: R63.1 R66.2 U27.1 | length 467.1
  Top Layer w12: R66.2@3635,2905 3819.29,2905 3832.54,2891.75 3843.47,2891.75 3921.63,2813.59 4022.45,2813.59 4029.48,2820.62 4029.48,2825.78 4042.09,2838.39 U27.1@4042.09,2847.24
NetR64_2: R64.2 R65.2 U30.3 | length 429.8
  Top Layer w12: R65.2@3155,2868.58 3147.13,2868.58 3132.46,2853.91 3132.46,2778.37 3124.46,2770.37 3124.46,2694.83 3157.13,2662.16 R64.2@3165,2662.16 3342.52,2662.16 U30.3@3347.6,2667.24
NetR65_1: R65.1 R67.2 U28.1 | length 502.7
  Top Layer w12: R67.2@2990,2868.58 2997.87,2868.58 3070.71,2941.42 R65.1@3155,2941.42 3169.67,2926.75 3356.91,2926.75 3404.8,2878.87 3404.8,2873.71 3417.4,2861.1 U28.1@3417.4,2852.24
NetR66_1: R66.1 R70.2 U27.4 | length 626.6
  Top Layer w12: R70.2@3635,2655 3631.06,2655 3592.49,2693.58 3592.49,2763.32 3612.46,2783.29 3612.46,2817.5 3627.13,2832.17 R66.1@3635,2832.17 3642.87,2832.17 3676.96,2866.25 3843.51,2866.25 3859.26,2850.51 3859.26,2835.74 3926.59,2768.41 3960.49,2768.41 3967.28,2761.61 U27.4@3967.28,2752.76
NetR67_1: R67.1 R71.2 U28.4 | length 922.3
  Top Layer w12: R71.2@2986.06,2661.61 R71.2@2990,2661.61 2993.94,2661.61 3032.51,2700.19 ; R67.1@2990,2941.42 2982.13,2941.42 2978,2937.29 2978,2901.25 2956.49,2901.25 2949.46,2894.22 2949.46,2842.94 2956.49,2835.91 2966.53,2835.91 3032.51,2769.93 3032.51,2700.19 ; U28.4@3342.6,2757.76 3342.6,2766.62 3335.8,2773.41 3296.59,2773.41 3210,2860 3210,2879.77 3184.77,2905 3115,2905 3064.76,2854.76 3064.76,2732.43 3032.51,2700.19
NetR68_1: R68.1 R72.2 U31.3 | length 404.1
  Top Layer w12: R68.1@3810,2286.26 3805.08,2286.26 3769.46,2321.88 3769.46,2445.64 3800.08,2476.26 R72.2@3805,2476.26 3822.62,2458.64 3963.08,2458.64 3969.88,2451.84 U31.3@3969.88,2450
NetR69_1: R69.1 R74.2 U32.3 | length 295.5
  Top Layer w12: R69.1@3170,2360 R74.2@3170,2471.26 3348.58,2471.26 U32.3@3352.6,2467.24
NetR70_1: R70.1 R73.2 | length 659.8
  Top Layer w12: R73.2@3630,2185 3626.06,2185 3605.49,2205.58 3605.49,2250.18 3589.46,2266.21 3589.46,2599.46 3606.43,2616.43 3670.48,2616.43 3677.51,2623.46 3677.51,2686.55 3674.53,2689.53 3674.53,2696.18 3638.94,2731.77 R70.1@3635,2731.77
NetR71_1: R71.1 R75.2 | length 618.9
  Top Layer w12: R71.1@2990,2738.39 2986.06,2738.39 2978,2730.32 2978,2700.19 2954.52,2700.19 2931.46,2677.13 2931.46,2247.99 2991.06,2188.39 R75.2@2995,2188.39
NetR72_1: R72.1 R78.2 U29.1 | length 465
  Top Layer w12: R78.2@3630,2551.1 3801.1,2551.1 R72.1@3805,2555 3809.92,2555 3854.3,2599.38 4005.32,2599.38 4032.08,2626.13 4032.08,2631.29 4044.68,2643.9 U29.1@4044.68,2652.76
NetR73_1: R73.1 R76.2 U33.4 | length 359.5
  Top Layer w12: R73.1@3630,2108.23 3809.64,2108.23 R76.2@3810,2108.58 3880,2108.58 3926.93,2155.51 U33.4@3969.88,2155.51
NetR74_1: R74.1 R80.2 U30.1 | length 588.9
  Top Layer w12: R80.2@2990,2470 3085.08,2470 3165.08,2550 R74.1@3170,2550 3174.92,2550 3214.92,2510 3336.26,2510 3375.93,2549.67 3375.93,2603.16 3415.61,2642.84 3415.61,2660.45 U30.1@3422.4,2667.24
NetR75_1: R75.1 R77.2 U34.4 | length 387.1
  Top Layer w12: R75.1@2995,2111.61 2995.55,2112.16 R77.2@3175,2112.16 3182.87,2112.16 3253.47,2182.76 U34.4@3352.6,2182.76
NetR76_1: R76.1 R79.1 U33.1 | length 497
  Top Layer w12: R79.1@3630,2291.85 3691.69,2291.85 3802.13,2181.42 R76.1@3810,2181.42 3824.67,2196.09 4004.79,2196.09 4037.89,2229.19 4037.89,2243.21 U33.1@4044.68,2250
NetR77_1: R77.1 R81.1 U34.1 | length 719
  Top Layer w12: R81.1@2995,2351.42 3002.87,2351.42 R81.1@3017.54,2336.75 ; R77.1@3175,2185 3167.13,2185 3017.54,2334.58 R81.1@3017.54,2336.75 ; U34.1@3427.4,2277.24 3420.61,2284.04 3420.61,2291.25 3428,2298.65 3428,2318.35 3417.46,2328.9 3265.39,2328.9 3260.87,2324.38 3136.49,2324.38 3124.12,2336.75 R81.1@3017.54,2336.75
NetR78_1: R78.1 R79.2 U29.4 | length 491.8
  Top Layer w12: R79.2@3630,2364.69 R78.1@3630,2478.27 3644.67,2492.94 3714.3,2492.94 3733.24,2511.88 3863.68,2511.88 3894.41,2542.62 3963.08,2542.62 3969.88,2549.41 U29.4@3969.88,2558.27
NetR80_1: R80.1 R81.2 U30.4 | length 701.6
  Top Layer w12: R81.2@2995,2278.58 2987.13,2278.58 2949.46,2316.25 2949.46,2510.17 2982.13,2542.84 R80.1@2990,2542.84 3004.67,2557.51 3122.43,2557.51 3129.46,2564.54 3129.46,2578.59 3136.49,2585.62 3340.8,2585.62 3347.6,2578.83 U30.4@3347.6,2572.76
PO1: *.25 P14.7 | length 1312.8
  Top Layer w12: *.25@3498.94,4247.4 3498.94,4263.15 3519.14,4283.35 3519.14,4310.3 3577.5,4368.66 3729.52,4368.66 3747.85,4387 3846.26,4387 3857.06,4376.2 3864.52,4376.2 3874.72,4366 3900,4340.72 3900,4332.22 3974.5,4257.72 4069.05,4257.72 4079.76,4247 4100.78,4247 4198,4149.78 4198,3834.01 4270.16,3761.85 P14.7@4280,3761.85
PO2: *.28 P14.8 | length 1569.7
  Top Layer w12: *.28@3400.51,4111.97 3384.76,4111.97 3364.56,4132.17 3362.16,4132.17 3355.05,4139.28 3355.05,4234.66 3383.39,4263 3446.38,4263 3570.05,4386.66 3709.95,4386.66 3728.29,4405 3853.72,4405 3856.15,4402.56 3863.61,4402.56 3882.17,4384 3918,4348.17 3918,4339.67 3981.96,4275.72 4076.5,4275.72 4087.22,4265 4108.24,4265 4216,4157.24 4216,3865.22 4270.16,3811.06 P14.8@4280,3811.06
PO3: *.27 P14.9 | length 1723.6
  Top Layer w12: *.27@3400.51,4161.97 3416.26,4161.97 3436.54,4141.69 3438.95,4141.69 3505.18,4075.45 3505.18,4067.49 3583.66,3989.01 3589.23,3989.01 3717,3861.24 3717,3849.31 3790,3776.31 v1(3790,3705) ; P14.9@4280,3860.28 4289.84,3860.28 4355,3795.12 v1(4355,3785)
  Bottom Layer w10: v1(3790,3705) 4026.21,3705 4109.21,3622 4195.87,3622 4299.87,3518 4386.54,3518 4417,3548.46 4417,3723 v1(4355,3785)
PO4: *.49 P14.10 | length 1376.3
  Top Layer w12: *.49@3648.94,3227.72 3648.94,3243.46 3669.22,3263.75 3669.22,3266.15 3676.25,3273.18 3838.58,3273.18 3849.76,3262 4166.72,3262 4298.36,3393.64 4298.36,3419.09 4430,3550.73 4430,3769.33 4289.84,3909.49 P14.10@4280,3909.49
RESET: P?.10 U10.40 | length 1290.2
  Top Layer w12: v1(2435,3740) 2645,3740 2825,3560 3165,3560 P?.10@3265,3660 ; v1(2545,3930) 2564.21,3949.21 U10.40@2645.71,3949.21
  Bottom Layer w10: v1(2435,3740) 2545,3850 v1(2545,3930)
SD0: SD1.7 U10.21 | length 1011.5
  Top Layer w12: U10.21@2984.29,3949.21 2984.39,3949.31 3021.39,3949.31 3045.79,3973.71 3045.79,4022.72 3304.07,4281 3438.93,4281 3562.59,4404.66 3702.5,4404.66 3720.84,4423 3736.96,4439.13 3736.96,4451.18 SD1.7@3747.7,4461.91
SD1: SD1.8 U10.22 | length 963.2
  Top Layer w12: U10.22@2984.29,3968.9 2984.39,3968.99 3015.62,3968.99 3027.79,3981.17 3027.79,4030.18 3296.61,4299 3431.47,4299 3555.14,4422.66 3681.13,4422.66 3697.59,4439.13 3697.59,4453.15 SD1.8@3706.36,4461.91
SD2: SD1.1 U10.25 | length 1380.3
  Top Layer w12: U10.25@2923.27,4069.29 2923.27,4088.79 2923.36,4088.88 3051.47,4088.88 3279.59,4317 3424.02,4317 3473,4365.98 3473,4473 v1(3475,4475) ; v1(3947.43,4414.26) 3950.45,4417.27 3974.95,4417.27 3996.81,4439.13 3996.81,4451.18 SD1.1@4007.54,4461.91
  Bottom Layer w10: v1(3475,4475) 3890,4475 3947.43,4417.57 v1(3947.43,4414.26)
SD3: SD1.3 U10.26 | length 1463.7
  Top Layer w12: U10.26@2903.58,4069.29 2903.68,4069.39 2903.68,4100.61 2915.85,4112.79 3049.92,4112.79 3272.13,4335 3412.78,4335 3450,4372.22 3450,4425.27 3438,4437.27 3438,4490.33 3534.67,4587 3898,4587 3940,4545 3940,4493.03 3935.5,4488.53 3935.5,4476.48 SD1.3@3920.93,4461.91
SDCLK: SD1.5 U10.34 | length 1757.6
  Top Layer w12: U10.34@2746.01,4100.62 2746.01,4069.39 U10.34@2746.1,4069.29 2746.1,4128.98 2728,4147.09 2728,4230.99 2765.8,4268.79 2765.8,4288.12 2807.67,4330 v1(2855,4330) ; SD1.5@3834.31,4461.91 3845.04,4451.18 3845.04,4439.13 3863.61,4420.56 3871.06,4420.56 3889.63,4402 3907.36,4402 3949.36,4360 v1(3955,4360)
  Bottom Layer w10: v1(2855,4330) 3000,4475 3388.54,4475 3427.54,4436 3765.09,4436 3788.09,4413 3897.78,4413 3950.78,4360 v1(3955,4360)
SDCS: SD1.2 U10.27 | length 1526.5
  Top Layer w12: U10.27@2883.9,4069.29 2883.99,4069.39 2883.99,4106.39 2908.4,4130.79 3042.46,4130.79 3264.67,4353 3405.33,4353 3432,4379.67 3432,4417.82 3420,4429.82 3420,4497.78 3527.22,4605 3915,4605 3958,4562 3958,4473.53 3955.31,4470.84 SD1.2@3964.23,4461.91
SWDIO: P?.2 U10.46 | length 1770.4
  Top Layer w12: U10.46@2645.71,3831.1 2541.1,3831.1 2507.5,3797.5 2440.17,3797.5 2398,3755.33 2398,3715.37 2423.37,3690 2525,3690 2630,3585 v1(2700,3585) ; P?.2@3265,4060 3265,4061.39 3300,4096.39 v1(3300,4165)
  Bottom Layer w10: v1(2700,3585) 2735,3585 2953.48,3803.48 3169.97,3803.48 3221.52,3855.03 3221.52,4086.52 v1(3300,4165)
VinA: U5.9 U6.1 U6.4 | length 1420.8
  Top Layer w12: U6.4@1462.6,2411.61 1498.4,2447.42 1501.6,2447.42 1530.61,2476.43 1530.61,2490.45 U6.1@1537.4,2497.24 1533.1,2501.55 1533.1,2536.9 v1(1525,2545) ; v1(2015,3130) 2112.33,3130 2122.33,3120 2217,3120 2217,3185.67 2309.46,3278.12 2309.46,3278.26 2327.22,3296.02 U5.9@2360.83,3296.02
  Bottom Layer w10: v1(1525,2545) 2015,3035 v1(2015,3130)
VinB: U5.10 U15.1 U15.4 | length 1140.2
  Top Layer w12: U15.4@2082.6,2460.51 2082.6,2469.37 2115.5,2502.27 2118.69,2502.27 2150.61,2534.19 2150.61,2548.21 U15.1@2157.4,2555 v1(2210,2555) ; v1(2105,3085) 2120,3070 2210,3070 2235,3095 2235,3178.21 2327.22,3270.43 U5.10@2360.83,3270.43
  Bottom Layer w10: v1@2110,3080 2210,2980 v1(2210,2555)
VinC: U5.11 U23.1 U23.4 | length 2537.2
  Top Layer w12: U23.4@1794.44,4872.2 v1(1794.44,4929.44) v1@1795,4930 ; U23.1@1888.93,4797.4 1897.79,4797.4 1925,4770.19 1925,4750 v1(1900,4750) ; v1(2280,3080) 2280,3197.62 2327.22,3244.84 U5.11@2360.83,3244.84
  Bottom Layer w10: v1(1794.44,4929.44) 1794.44,4855.56 1860,4790 ; v1(1900,4750) 1860,4790 ; v1(2280,3080) 2175,3080 1860,3395 1860,4790
VinD: U5.12 U32.1 U32.4 | length 1567.3
  Top Layer w12: U5.12@2360.83,3219.25 2393.31,3219.25 2562.56,3050 v1(2705,3050) ; v1(3230,2400) 3230,2385 3242.24,2372.76 U32.4@3352.6,2372.76 3352.6,2381.62 3388.4,2417.42 3391.6,2417.42 3420.61,2446.43 3420.61,2460.45 U32.1@3427.4,2467.24
  Bottom Layer w10: v1@2722.5,3032.5 2854.54,2900.46 2830.09,2876 2859.91,2876 2881,2854.91 2881,2825.09 2877.96,2822.04 3230,2470 v1(3230,2400)
VinE: U5.13 U7.1 U7.4 | length 1254.8
  Top Layer w12: U7.1@1760,3697.4 1766.8,3690.61 1780.81,3690.61 1809.82,3661.6 1809.82,3658.4 1845.63,3622.6 U7.4@1854.49,3622.6 1854.49,3590.51 v1(1900,3545) ; U5.13@2589.17,3219.25 2604.18,3219.25 2605,3218.43 v1(2605,3095)
  Bottom Layer w10: v1(1900,3545) 2350,3095 v1(2605,3095)
VinF: U5.14 U16.1 U16.4 | length 981.3
  Top Layer w12: U5.14@2589.17,3244.84 2622.14,3244.84 2628.84,3238.14 2629.48,3238.14 2665,3202.62 v1(2665,3095) ; U16.4@2715.2,2430.31 2715.2,2439.17 2751,2474.98 2754.19,2474.98 2783.2,2503.99 2783.2,2518.01 U16.1@2790,2524.8 2790,2533.66 2815,2558.66 v1@2815,2570
  Bottom Layer w10: v1(2665,3095) 2665,3055.91 2644,3034.91 2644,2741 v1(2810,2575)
VinG: U5.15 U24.1 U24.4 | length 2093.9
  Top Layer w12: U24.1@1890,4292.4 1898.86,4292.4 1911.46,4279.8 1916.62,4279.8 1939.82,4256.6 1939.82,4253.4 1975.63,4217.6 U24.4@1984.49,4217.6 v1(1984.49,4119.49) v1@1980,4115 ; U5.15@2589.17,3270.43 2622.14,3270.43 2628.84,3263.73 2629.48,3263.73 2775,3118.21 v1(2775,3105)
  Bottom Layer w10: v1(1984.49,4119.49) 1984.49,3973.09 2126,3831.58 2126,3341.63 2356.63,3111 2570.09,3111 2590.09,3131 2729,3131 2755,3105 v1(2775,3105)
VinH: U5.16 U31.1 U31.4 | length 2028.8
  Top Layer w12: U5.16@2589.17,3296.02 2589.51,3295.68 2639.32,3295.68 2800,3135 v1(2855,3135) ; v1@3905,2335 3925.51,2355.51 U31.4@3969.88,2355.51 3969.88,2364.37 4005.69,2400.18 4008.88,2400.18 4037.89,2429.19 4037.89,2443.21 U31.1@4044.68,2450
  Bottom Layer w10: v1(2855,3135) 3085,2905 3520,2905 3703.67,2721.33 3703.67,2516.33 v1(3895,2325)
WFCLK: *.19 U10.13 | length 1284.5
  Top Layer w12: U10.13@2984.29,3791.73 2984.29,3740.71 v1(3040,3685) ; v1(3795,4345) 3796.97,4343.03 3796.97,4249.37 *.19@3798.94,4247.4
  Bottom Layer w10: v1(3040,3685) 3071.52,3716.52 3183.01,3716.52 3215,3748.51 3215,3771.49 3260.03,3816.52 3283.01,3816.52 3308.48,3841.99 3308.48,3854.39 3593.09,4139 3599.91,4139 3621,4160.09 3621,4171 v1(3795,4345)
WFCS: *.17 U10.15 | length 1588.3
  Top Layer w12: U10.15@2984.29,3831.1 2984.2,3831.01 2952.97,3831.01 2940,3818.04 2940,3764.89 2960,3744.89 2960,3670 v1(2995,3635) ; v1(3849.2,4339.2) 3858.61,4339.2 3898.94,4298.87 *.17@3898.94,4247.4
  Bottom Layer w10: v1(2995,3635) 3121.52,3635 3140,3616.52 3183.01,3616.52 3221.52,3655.03 3221.52,3678.01 3260.03,3716.52 3283.01,3716.52 3368.28,3801.79 3368.28,3824.44 3497.83,3954 3509.91,3954 3849.2,4293.28 v1(3849.2,4339.2)
WFMISO: *.36 U10.14 | length 546.2
  Top Layer w12: U10.14@2984.29,3811.42 3048.61,3811.42 3144.51,3715.52 3183.42,3715.52 3215,3747.1 3215,3772.9 3246.58,3804.48 3283.42,3804.48 3364.22,3723.69 3388.8,3723.69 *.36@3400.51,3711.97
WFMOSI: *.35 U10.16 | length 567.4
  Top Layer w12: U10.16@2984.29,3850.79 3111.31,3850.79 3146.58,3815.52 3183.42,3815.52 3215,3847.1 3215,3872.9 3246.58,3904.48 3283.42,3904.48 3322.75,3865.15 3322.75,3821.58 3362.08,3782.25 3364.48,3782.25 3384.76,3761.97 *.35@3400.51,3761.97
pads on no net: *.40 P12.MP1 P12.MP2 P13.MP1 P13.MP2 P14.MP1 P14.MP2 P15.MP1 P15.MP2 P?.6 P?.7 P?.8 P?.9 SD1.9 SD1.10 SD1.13 SD1.14 U10.1 U10.2 U10.3 U10.4 U10.5 U10.7 U10.8 U10.9 U10.12 U10.23 U10.24 U10.33 U10.39 U10.41 U10.47 U10.48

## Polygon pours and split planes (outlines as drawn)
GND on Top Layer "Top Layer-No Net" (solid, shelved, pour order 4): 1005,5005 4465,5005 4465,1630 1005,1630
no net on Top Layer "Top Layer-No Net 1" (solid, pour order 2): 1000,5000

## Text inside footprints (layer, text, board x,y; h text height)
P?: Top Overlay "10" at 3250.43,3591.89 h40 r270; Top Overlay "9" at 3144.13,3591.89 h40 r270; Top Overlay "1" at 3144.13,4143.86 h40 r270; Top Overlay "2" at 3250.43,4155.67 h40 r270